# Altium PCB cheating-calc.PcbDoc
Units mm, origin at the board's own origin, x right, y up, seen from the top; angles counter-clockwise.
Board outline 72 x 22 mm, 2 copper layers (F.Cu, B.Cu); 8 components, 16 nets, 32 pads, 4 vias.
Unrouted connection lines stored in the file: 1.
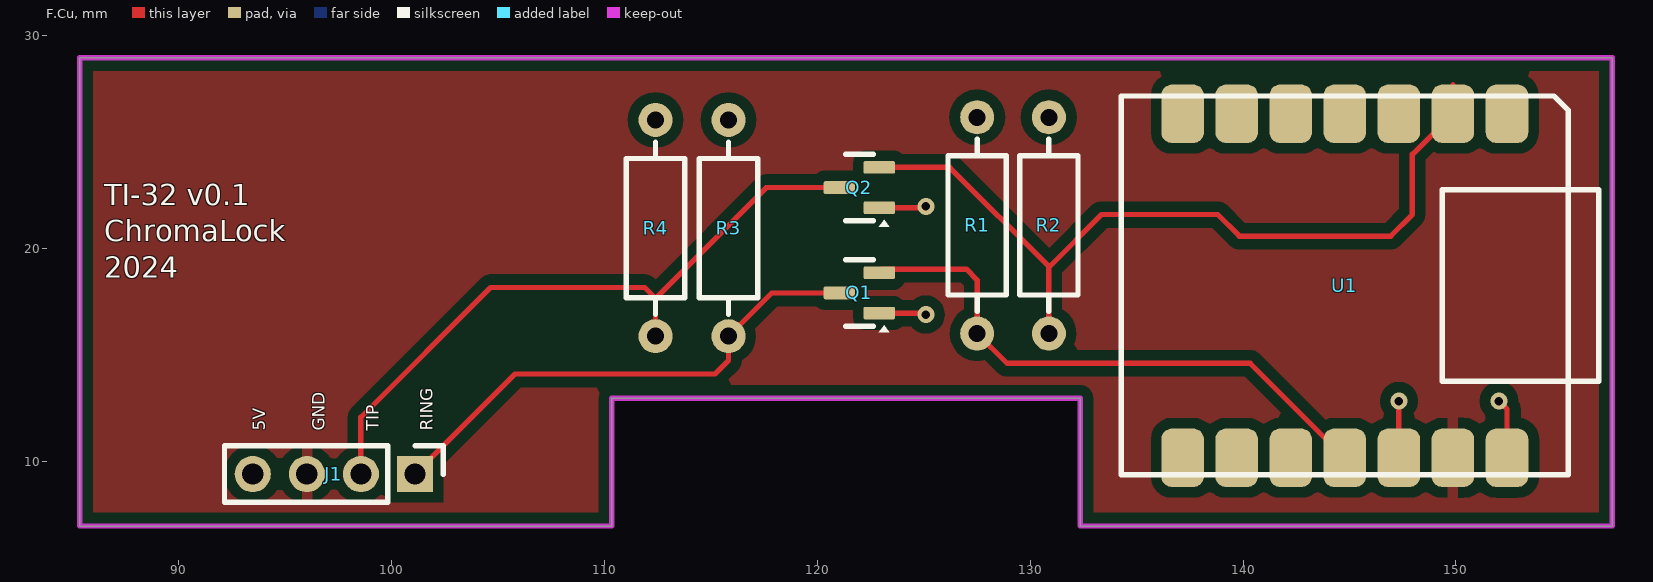
[diagram p0: F.Cu view]
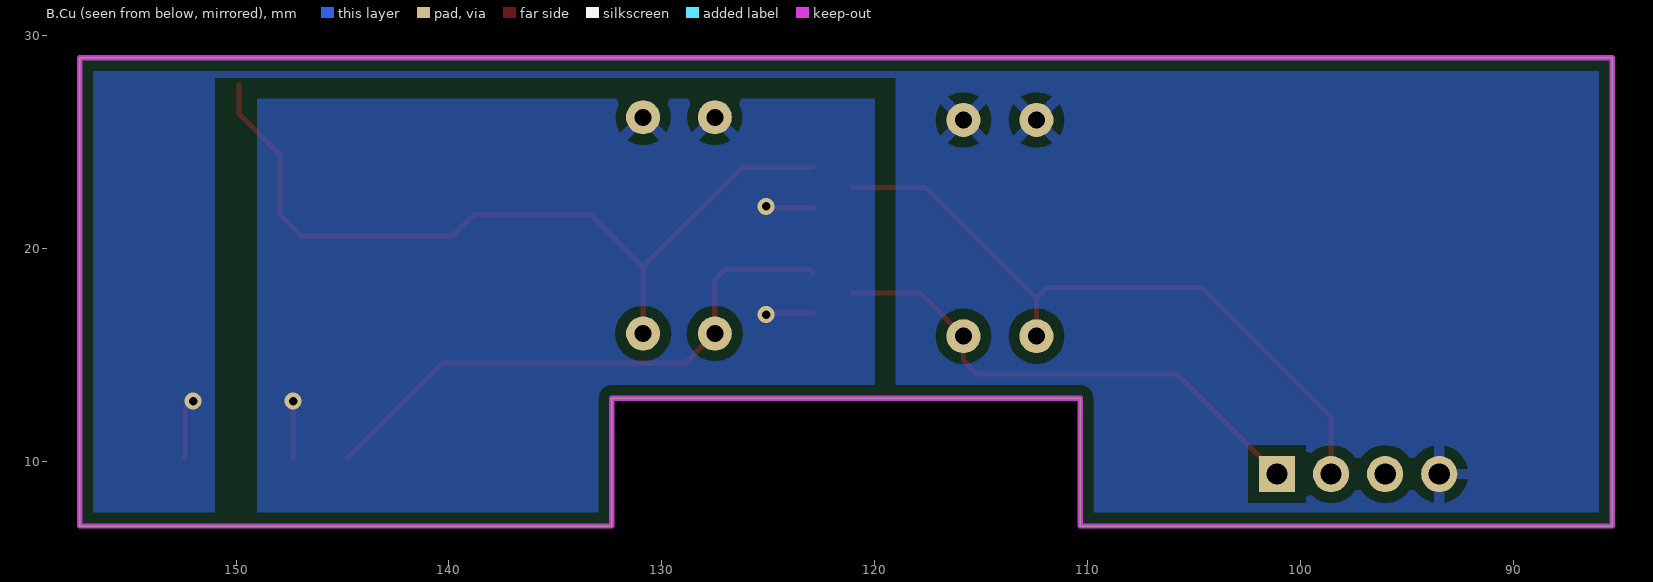
[diagram p1: B.Cu view, seen from below]

## Layer stack, top to bottom
F.Mask: solder mask 0.0102, Solder Resist, Dk 3.5
F.Cu: signal copper 0.0356
Dielectric 1: dielectric 0.32, FR-4, Dk 4.8
B.Cu: signal copper 0.0356
B.Mask: solder mask 0.0102, Solder Resist, Dk 3.5

## Board outline
132.344,12.958 132.344,6.958 157.344,6.958 157.344,28.958 132.344,28.958 110.344,28.958 85.344,28.958 85.344,6.958 110.344,6.958 110.344,12.958 132.344,12.958

## Design rules (kind name [scope] priority, off if disabled: settings)
Clearance "Clearence 0.5_Polygon" [InNamedPolygon('F.Cu-GND') OR InNamedPolygon('B.Cu-+5V') OR InNamedPolygon('B.Cu-+3.3V')] p1: gap=0.5 ignorepadtopadclearanceinfootprint=FALSE
MinimumSolderMaskSliver [All] p1: minsoldermaskwidth=0
PolygonConnect Polygon_B.Cu-+3.3V_ConnectDirect [IsNamedPolygon('B.Cu-+3.3V') vs IsVia] p1: connectstyle=Direct reliefconductorwidth=0.254 reliefentries=4 polygonreliefangle="90 Angle" airgapwidth=0.254
PolygonConnect Polygon_B.Cu-+3.3V_ConnectRelief45 [IsNamedPolygon('B.Cu-+3.3V') vs (IsThruPin or IsSMTPin) and (PadShape_AllLayers = 'Round')] p2: connectstyle=Relief reliefconductorwidth=0.5 reliefentries=4 polygonreliefangle="45 Angle" airgapwidth=0.5
PolygonConnect Polygon_B.Cu-+3.3V_ConnectRelief90 [IsNamedPolygon('B.Cu-+3.3V') vs (IsThruPin or IsSMTPin) and (PadShape_AllLayers <> 'Round')] p3: connectstyle=Relief reliefconductorwidth=0.5 reliefentries=4 polygonreliefangle="90 Angle" airgapwidth=0.5
PolygonConnect Polygon_B.Cu-+5V_ConnectDirect [IsNamedPolygon('B.Cu-+5V') vs IsVia] p4: connectstyle=Direct reliefconductorwidth=0.254 reliefentries=4 polygonreliefangle="90 Angle" airgapwidth=0.254
PolygonConnect Polygon_B.Cu-+5V_ConnectRelief45 [IsNamedPolygon('B.Cu-+5V') vs (IsThruPin or IsSMTPin) and (PadShape_AllLayers = 'Round')] p5: connectstyle=Relief reliefconductorwidth=0.5 reliefentries=4 polygonreliefangle="45 Angle" airgapwidth=0.5
PolygonConnect Polygon_B.Cu-+5V_ConnectRelief90 [IsNamedPolygon('B.Cu-+5V') vs (IsThruPin or IsSMTPin) and (PadShape_AllLayers <> 'Round')] p6: connectstyle=Relief reliefconductorwidth=0.5 reliefentries=4 polygonreliefangle="90 Angle" airgapwidth=0.5
PolygonConnect Polygon_F.Cu-GND_ConnectDirect [IsNamedPolygon('F.Cu-GND') vs IsVia] p7: connectstyle=Direct reliefconductorwidth=0.254 reliefentries=4 polygonreliefangle="90 Angle" airgapwidth=0.254
PolygonConnect Polygon_F.Cu-GND_ConnectRelief45 [IsNamedPolygon('F.Cu-GND') vs (IsThruPin or IsSMTPin) and (PadShape_AllLayers = 'Round')] p8: connectstyle=Relief reliefconductorwidth=0.5 reliefentries=4 polygonreliefangle="45 Angle" airgapwidth=0.5
PolygonConnect Polygon_F.Cu-GND_ConnectRelief90 [IsNamedPolygon('F.Cu-GND') vs (IsThruPin or IsSMTPin) and (PadShape_AllLayers <> 'Round')] p9: connectstyle=Relief reliefconductorwidth=0.5 reliefentries=4 polygonreliefangle="90 Angle" airgapwidth=0.5
RoutingVias [All] p1: holewidth=0.711 width=1.27 viastyle="Through Hole" minholewidth=0.711 minwidth=1.27 maxholewidth=0.711 maxwidth=1.27
SilkToSilkClearance [All] p1: silktosilkclearance=0
SilkToSolderMaskClearance [IsPad] p1: minsilkscreentomaskgap=0 clearancetoexposedcopper=TRUE
SolderMaskExpansion [All] p1: expansion=0.102 istentingtop=FALSE
Width [All] p1: maxlimit=10 minlimit=0.254 preferedwidth=0.254 minimp=50.000000 maximp=50.000000 favimp=50.000000
27 further rules are at their usual default settings.

## Components (designator, comment, footprint, x,y, rotation, side; value= is the part's Value field where it differs from the comment)
J1 "Conn_01x04" PinHeader_1x04_P2.54mm_Vertical 101.092,9.4 r270 top
Q1 "MMBF170" SOT-23 121.968,17.909 r180 top
Q2 "MMBF170" SOT-23 121.968,22.862 r180 top
R1 "R" R_Axial_DIN0207_L6.3mm_D2.5mm_P10.16mm_Horizontal 127.508,26.164 r270 top
R2 "R" R_Axial_DIN0207_L6.3mm_D2.5mm_P10.16mm_Horizontal 130.876,26.164 r270 top
R3 "R" R_Axial_DIN0207_L6.3mm_D2.5mm_P10.16mm_Horizontal 115.824,26.037 r270 top
R4 "R" R_Axial_DIN0207_L6.3mm_D2.5mm_P10.16mm_Horizontal 112.395,26.037 r270 top
U1 "MOUDLE-SEEEDUINO-XIAO-ESP32C3" MOUDLE14P-SMD-2.54-21X17.8MM 134.28,27.162 r270 top

## Footprints (in the part's own frame and the unit in brackets; to place one, negate y for a bottom-side part, rotate by r counter-clockwise, add the part's x,y. Pads: shape width x height; smd on the part's side, far side on the other; paste and mask are expansions set on the pad)
MOUDLE14P-SMD-2.54-21X17.8MM [mm]
  rrect50% 2.75x2 smd mask+0: 1(0.835,18.12) 2(0.835,15.58) 3(0.835,13.04) 4(0.835,10.5) 5(0.835,7.96) 6(0.835,5.42) 7(0.835,2.88) 8(17,2.88) 9(17,5.42) 10(17,7.96) 11(17,10.5) 12(17,13.04) 13(17,15.58) 14(17,18.12)
  silkscreen extent 0,0 17.8,22.42
PinHeader_1x04_P2.54mm_Vertical [mm]
  rect 1.7x1.7 hole 1 paste-2539.97 mask+0: 1(0,0)
  rrect100% 1.7x1.7 hole 1 paste-2539.97 mask+0: 2(0,-2.54) 3(0,-5.08) 4(0,-7.62)
  silkscreen extent -1.33,-8.95 1.33,1.33
R_Axial_DIN0207_L6.3mm_D2.5mm_P10.16mm_Horizontal [mm]
  round 1.6 hole 0.8 paste-2539.97 mask+0: 1(0,0)
  rrect100% 1.6x1.6 hole 0.8 paste-2539.97 mask+0: 2(10.16,0)
  silkscreen extent 1.04,-1.37 9.12,1.37
SOT-23 [mm]
  rrect25% 1.475x0.6 smd mask+0: 1(-0.937,0.95) 2(-0.937,-0.95) 3(0.937,0)
  silkscreen extent -1.4,-1.56 0.65,1.84

## Part data
J1: library part PinHeader_1x04_P2.54mm_Vertical, "Through hole straight pin header, 1x04, 2.54mm pitch, single row", Sheetfile=cheating-calc.kicad_sch, ki_description="Generic connector, single row, 01x04, script generated (kicad-library-utils/schlib/autogen/connector/)", ki_keywords=connector
Q1 Q2: library part SOT-23, "SOT, 3 Pin (https://www.jedec.org/system/files/docs/to-236h.pdf variant AB), generated with kicad-footprint-generator ipc_gullwing_generator.py", Sheetfile=cheating-calc.kicad_sch, ki_description="0.5A Id, 60V Vds, N-Channel MOSFET, SOT-23", ki_keywords="N-Channel MOSFET"
R1 R2 R3 R4: library part R_Axial_DIN0207_L6.3mm_D2.5mm_P10.16mm_Horizontal, "Resistor, Axial_DIN0207 series, Axial, Horizontal, pin pitch=10.16mm, 0.25W = 1/4W, length*diameter=6.3*2.5mm^2, http://cdn-reichelt.de/documents/datenblatt/B400/1_4W%23YAG.pdf", Sheetfile=cheating-calc.kicad_sch, ki_description=Resistor, ki_keywords="R res resistor"
U1: library part MOUDLE14P-SMD-2.54-21X17.8MM, Sheetfile=cheating-calc.kicad_sch

## Via types
v1: diameter 0.8, hole 0.4, F.Cu to B.Cu, tented both sides, 4 vias

## Nets (pads, with @x,y where several pads share a name; then routed paths per layer and width w, separated by ;. In a path a pad name is that pad's centre, name@x,y a point inside that pad or via, vN(x,y) a via of type N, cw(c..) or ccw(c..) an arc to the next point about the centre after c; other vN are vias at no path point)
+3.3V: Q1.1 Q2.1 R1.1 R2.1 U1.12 | length 7.1
  F.Cu w0.25: Q1.1 125.029,16.959 v1(125.095,16.893) ; Q2.1 125.034,21.912 v1(125.095,21.973) ; U1.12 v1(147.32,12.829)
+5V: J1.4 R3.1 R4.1 U1.14 | length 2.8
  F.Cu w0.25: v1(152.019,12.829) 152.4,12.448 U1.14
GND: J1.3 U1.13
RING: J1.1 Q1.3 R3.2 | length 24.1
  F.Cu w0.25: J1.1 105.791,14.099 115.189,14.099 115.824,14.734 R3.2 117.856,17.909 Q1.3
RING_GPIO: Q1.2 R1.2 U1.11 | length 27.1
  F.Cu w0.25: Q1.2 123.075,19.028 127,19.028 127.508,18.52 R1.2 128.905,14.607 140.335,14.607 U1.11
TIP: J1.2 Q2.3 R4.2 | length 31.8
  F.Cu w0.25: J1.2 98.552,12.067 104.648,18.163 111.887,18.163 112.395,17.655 ; R4.2 112.395,17.655 ; Q2.3 117.602,22.862 112.395,17.655
TIP_GPIO: Q2.2 R2.2 U1.2 | length 42
  F.Cu w0.25: Q2.2 126.216,23.812 130.876,19.152 R2.2 130.876,19.118 133.35,21.592 138.811,21.592 139.827,20.576 146.939,20.576 147.955,21.592 147.955,24.422 U1.2 U1.2@149.86,27.688
unconnected-(U1-PA02_A0_D0-Pad1): U1.1
unconnected-(U1-PA5_A9_D9_MISO-Pad10): U1.10
unconnected-(U1-PA7_A8_D8_SCK-Pad9): U1.9
unconnected-(U1-PA8_A4_D4_SDA-Pad5): U1.5
unconnected-(U1-PA9_A5_D5_SCL-Pad6): U1.6
unconnected-(U1-PA10_A2_D2-Pad3): U1.3
unconnected-(U1-PA11_A3_D3-Pad4): U1.4
unconnected-(U1-PB08_A6_D6_TX-Pad7): U1.7
unconnected-(U1-PB09_A7_D7_RX-Pad8): U1.8

## Polygon pours and split planes (outlines as drawn)
GND on F.Cu "F.Cu-GND" (solid, remove dead copper, pour order 4): 159,5.028 159,31.028 83,31.028 83,5.028
+3.3V on B.Cu "B.Cu-+3.3V" (solid, remove dead copper, pour order 5): 149,4.028 120,4.028 120,27.028 149,27.028
+5V on B.Cu "B.Cu-+5V" (solid, remove dead copper, pour order 3): 84,4.028 84,32.028 161,32.028 161,4.393 151,4.393 151,28.028 119,28.028 119,4.028

## Keep-outs
Edge.Cuts:
  lines w0: 85.344,6.958 110.344,6.958 110.344,12.958 132.344,12.958 132.344,6.958 157.344,6.958 157.344,28.958 132.344,28.958 110.344,28.958 85.344,28.958 85.344,6.958
  lines w0.254: 85.344,6.958 110.344,6.958 110.344,12.958 132.344,12.958 132.344,6.958 157.344,6.958 157.344,28.958 132.344,28.958 110.344,28.958 85.344,28.958 85.344,6.958

## Silkscreen, mask and mechanical layers (free items; w line width, h text height)
F.SilkS:
  text "TI-32 v0.1 / ChromaLock / 2024" at 86.487,18.298 h1.7
  text "5V" at 94.262,11.432 h1 r90
  text "GND" at 97.058,11.432 h1 r90
  text "TIP" at 99.591,11.432 h1 r90
  text "RING" at 102.138,11.432 h1 r90